# EAGLE board DroneBoard (EAGLE 7.7.0)

Size 39.3 x 106.5 mm. Coordinates in mm from the lower left corner, seen from the top.
Copper layers (1*16): Top 0.035mm / dielectric 1.5mm / Bottom 0.035mm
Design rules "default": minimum track width 10mil, minimum drill 24mil, track to track 8mil, track to pad 8mil, pad to pad 8mil, via to via 8mil, smd to smd 8mil, copper to edge 40mil, drill to drill 8mil, minimum pad ring 10mil, minimum via ring 8mil, stop-mask expansion 4mil, vias tented up to drill 0mil, thermal gap 10mil

## Footprints (pad centres in the part's own frame; a part is rotated, then mirrored left to right if it is on the bottom)
C0603 = smd 0.889 x 0.889: 1 -0.762,0; 2 0.762,0
153CLV-0505 = smd 3 x 1.6: + 2.2,0; - -2.2,0
SO14 = smd 0.66 x 2.032: 1 -3.81,-3.073; 2 -2.54,-3.073; 3 -1.27,-3.073; 4 0,-3.073; 5 1.27,-3.073; 6 2.54,-3.073; 7 3.81,-3.073; 8 3.81,3.073; 9 2.54,3.073; 10 1.27,3.073; 11 0,3.073; 12 -1.27,3.073; 13 -2.54,3.073; 14 -3.81,3.073
R0603 = smd 0.889 x 0.889: 1 -0.762,0; 2 0.762,0
POWER_16_SHROUDED = drill 1.016 pad 1.88 square: 1 -8.89,-1.27 | drill 1.016 pad 1.88: 2 -8.89,1.27; 3 -6.35,-1.27; 4 -6.35,1.27; 5 -3.81,-1.27; 6 -3.81,1.27; 7 -1.27,-1.27; 8 -1.27,1.27; 9 1.27,-1.27; 10 1.27,1.27; 11 3.81,-1.27; 12 3.81,1.27; 13 6.35,-1.27; 14 6.35,1.27; 15 8.89,-1.27; 16 8.89,1.27
OG-POTS_ALPS_POT_VERTICAL = drill 1 pad 1.88: P$1 -2.58,-6.7; P$2 0,-6.7; P$3 2.58,-6.7 | drill 2.2 pad 3.175: P$4 4.4,0; P$5 -4.4,0
3.5MM-JACK-SWITCH-13MM-OUTPUT = drill 0.8 pad 1.93 long: RING@3 -3.7,0; SECOND@3 0,-3.5; SWITCH@3 3.7,0; TIP@3 0,4.5

## Placement (x,y rotation side)
C1  [C0603]  16.01,41.91 270 top
C2  [C0603]  21.09,44.45 270 top
C3  [C0603]  16.01,60.96 270 top
C4  [C0603]  23.63,48.26 90 top
C5  [C0603]  23.63,43.18 90 top
C6  [C0603]  -10.66,-34.29 0 top  (outside the outline)
C9  [153CLV-0505]  -5.58,-55.88 0 top  (outside the outline)
C10  [153CLV-0505]  -5.58,-63.5 0 top  (outside the outline)
IC2  40106D  [SO14]  19.82,54.61 0 top
R5  [R0603]  -10.66,-22.86 0 top  (outside the outline)
R6  [R0603]  -10.66,-30.48 0 top  (outside the outline)
R7  [R0603]  -10.66,-45.72 0 top  (outside the outline)
R8  [R0603]  -10.66,-49.53 0 top  (outside the outline)
U$1  POWERSHROUDED  [POWER_16_SHROUDED]  50.3,123.19 270 bottom  (outside the outline)
U$2  EURORACK_PCB8HP  [EURORACK8HPPCB]  -0.5,0 0 top
U$3  [OG-POTS_ALPS_POT_VERTICAL]  7.12,58.42 180 top
U$4  [OG-POTS_ALPS_POT_VERTICAL]  7.12,22.86 90 top
U$5  [OG-POTS_ALPS_POT_VERTICAL]  32.52,22.86 270 top
U$6  [OG-POTS_ALPS_POT_VERTICAL]  32.52,58.42 180 top
U$7  [OG-POTS_ALPS_POT_VERTICAL]  32.52,93.98 180 top
U$8  [OG-POTS_ALPS_POT_VERTICAL]  7.12,93.98 180 top
U$9  [OG-POTS_ALPS_POT_VERTICAL]  117.61,77.47 0 top  (outside the outline)
U$10  PJ-341  [3.5MM-JACK-SWITCH-13MM-OUTPUT]  7.12,43.18 0 top
U$11  PJ-341  [3.5MM-JACK-SWITCH-13MM-OUTPUT]  32.52,78.74 0 top
U$12  PJ-341  [3.5MM-JACK-SWITCH-13MM-OUTPUT]  7.12,78.74 0 top
U$13  PJ-341  [3.5MM-JACK-SWITCH-13MM-OUTPUT]  7.12,7.62 0 top
U$14  PJ-341  [3.5MM-JACK-SWITCH-13MM-OUTPUT]  32.52,7.62 0 top
U$15  PJ-341  [3.5MM-JACK-SWITCH-13MM-OUTPUT]  32.52,43.18 0 top
U$16  PJ-341  [3.5MM-JACK-SWITCH-13MM-OUTPUT]  19.82,7.62 0 top

## Library data of the parts
C1-C6 R5-R8 = OPL
C9 C10 = adafruit
IC2 = 40xx
U$1 U$2 = EurorackModularParts
U$3-U$9 = EurorackModularParts; DESC: Parameter
U$10-U$16 = EurorackModularParts; DESC: Output; MPN: PJ-341

## Nets
+12V: C1.2 C3.2 IC2.14 U$1.9 U$1.10
-12V: C2.2 C4.2 IC2.7 U$1.1 U$1.2
GND: C1.1 C2.1 C3.1 C4.1 C5.2 C6.2 C9.- C10.- U$1.3 U$1.4 U$1.5 U$1.6 U$1.7 U$1.8
IN1: C5.1 IC2.1 R5.2
IN2: C6.1 IC2.3 R6.2
N$5: U$3.P$3
N$6: C9.+ IC2.5 R7.2
N$7: IC2.8 U$7.P$2 U$7.P$3
N$8: R5.1 U$5.P$1
N$9: R6.1 U$9.P$1
N$10: C10.+ IC2.9 R8.2
N$11: R7.1 U$6.P$1
N$12: R8.1 U$7.P$1
N$13: IC2.6 U$6.P$2 U$6.P$3
OUT1: IC2.2 U$5.P$2 U$5.P$3
OUT2: IC2.4 U$9.P$2 U$9.P$3

## Tracks (layer width: path | path; a pad name or v marks a point on that pad's centre or on a via)
+12V  (4 unrouted)
-12V  (4 unrouted)
GND  (13 unrouted)
IN1  (2 unrouted)
IN2  (2 unrouted)
N$6  (2 unrouted)
N$7  (2 unrouted)
N$8  (1 unrouted)
N$9  (1 unrouted)
N$10  (2 unrouted)
N$11  (1 unrouted)
N$12  (1 unrouted)
N$13  (2 unrouted)
OUT1  (2 unrouted)
OUT2  (2 unrouted)